# EAGLE board eggShield (EAGLE 6.2)
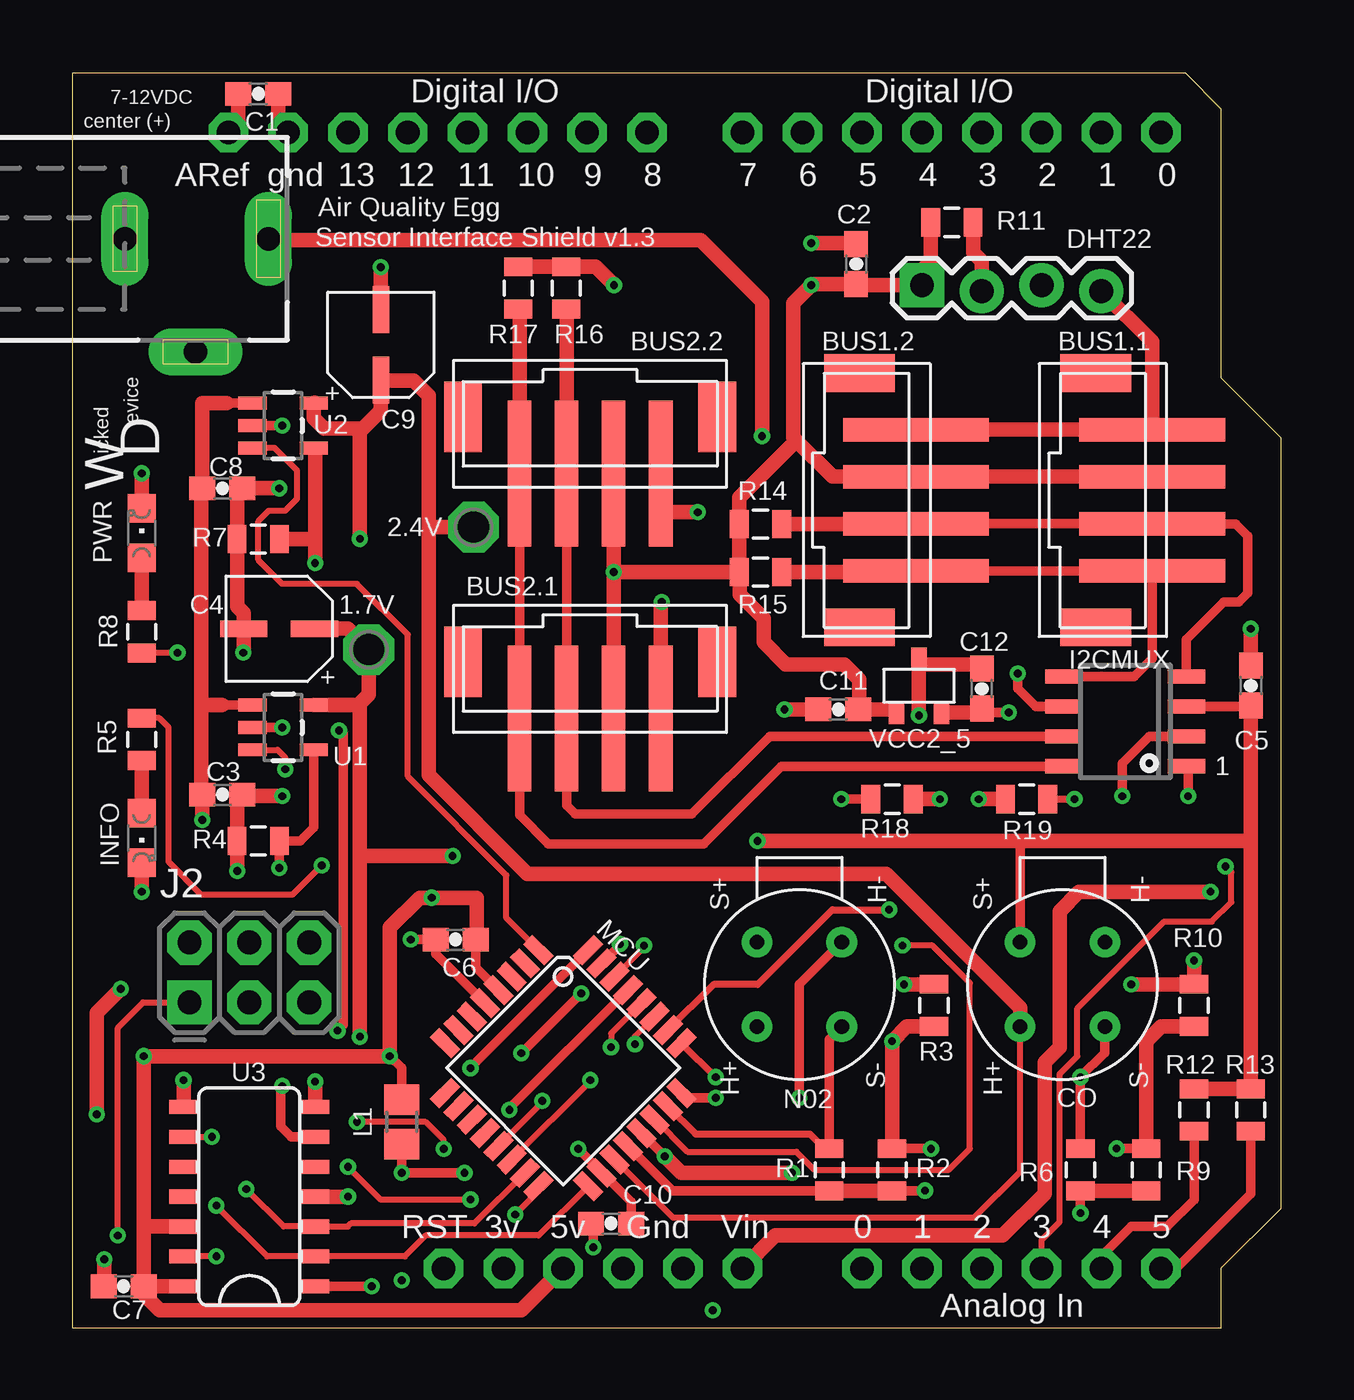
[diagram p0: board, top side]
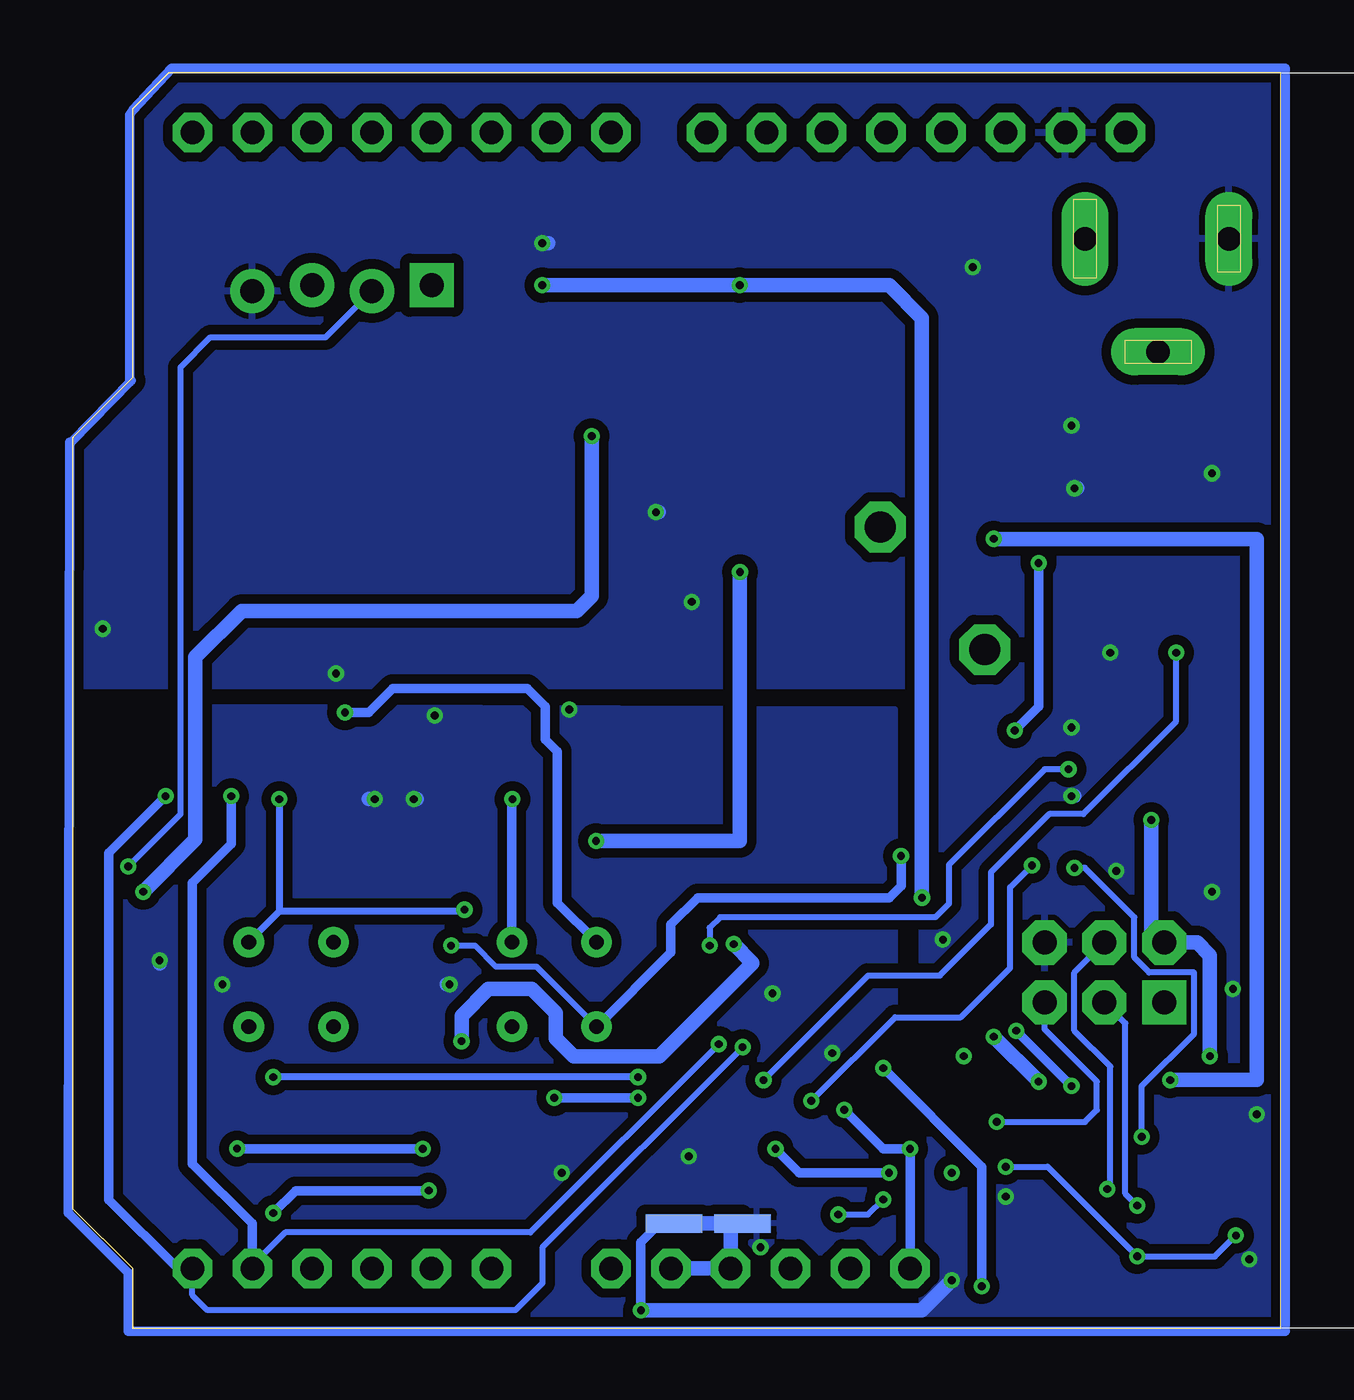
[diagram p1: board, bottom side, seen from below]

Size 51.31 x 53.34 mm. Coordinates in mm from the lower left corner, seen from the top.
Outline: 0,0 0,53.34 47.24,53.34 48.77,51.82 48.77,40.39 51.31,37.85 51.31,5.08 48.77,2.54 48.77,0 0,0
Copper layers (1*16): Top 0.0356mm / dielectric 1.5011mm / Bottom 0.0356mm
Design rules: minimum track width 6mil, minimum drill 13mil, track to track 6mil, track to pad 6mil, pad to pad 6mil, via to via 6mil, smd to smd 6mil, copper to edge 15mil, drill to drill 6mil, minimum pad ring 7mil, minimum via ring 7mil, stop-mask expansion 4mil, vias tented up to drill 0mil, thermal gap 10mil

## Footprints (pad centres in the part's own frame; a part is rotated, then mirrored left to right if it is on the bottom)
DCJ0202 = drill 1 pad 2 long: 1 0,3.1; 2 4.8,0; 3 0,-3
1775470-4 = smd 1 x 6.2: 1 3,0; 2 1,0; 3 -1,0; 4 -3,0 | smd 1.6 x 3: P$5 -5.4,-2.4; P$6 5.4,-2.4
0603-CAP = smd 1.1 x 1: 1 -0.85,0; 2 0.85,0
TYPE-B_ALUMINUM_CAN = smd 0.7 x 2: P$1 0,-1.5; P$2 0,1.5
SR-4 = drill 0.62 pad 1.3: FIGG/E2VS+ 1.8,1.8; FIGSIG/E2VH+ -1.8,1.8; FIGV+/E2V- 1.8,-1.8; FIGV+/E2VSIG -1.8,-1.8
1X04_LOCK = drill 1.016 pad 1.88: DATA 2.54,-0.127; GND 7.62,-0.127; NULL 5.08,0.127 | drill 1.016 pad 1.88 square: VDD 0,0.127
SO8 = smd 0.6 x 1.6: 1 -1.905,-2.6; 2 -0.635,-2.6; 3 0.635,-2.6; 4 1.905,-2.6; 5 1.905,2.6; 6 0.635,2.6; 7 -0.635,2.6; 8 -1.905,2.6
CHIPLED_0805 = smd 1.2 x 1.2: A 0,-1.05; C 0,1.05
2X3-NS = drill 1.016 pad 1.88 square: 1 -2.54,-1.27 | drill 1.016 pad 1.88 octagon: 2 -2.54,1.27; 3 0,-1.27; 4 0,1.27; 5 2.54,-1.27; 6 2.54,1.27
RCL_R0805 = smd 1.3 x 1.5: 1 -0.95,0; 2 0.95,0
TQFP32-08 = smd 1.27 x 0.559: 1 -4.293,2.8; 2 -4.293,2; 3 -4.293,1.2; 4 -4.293,0.4; 5 -4.293,-0.4; 6 -4.293,-1.2; 7 -4.293,-2; 8 -4.293,-2.8; 17 4.293,-2.8; 18 4.293,-2; 19 4.293,-1.2; 20 4.293,-0.4; 21 4.293,0.4; 22 4.293,1.2; 23 4.293,2; 24 4.293,2.8 | smd 0.559 x 1.27: 9 -2.8,-4.293; 10 -2,-4.293; 11 -1.2,-4.293; 12 -0.4,-4.293; 13 0.4,-4.293; 14 1.2,-4.293; 15 2,-4.293; 16 2.8,-4.293; 25 2.8,4.293; 26 2,4.293; 27 1.2,4.293; 28 0.4,4.293; 29 -0.4,4.293; 30 -1.2,4.293; 31 -2,4.293; 32 -2.8,4.293
0805 = smd 0.8 x 1.2: 1 -0.9,0; 2 0.9,0
P1-13 = drill 1.321 pad 2.159 octagon: TP 0,0
SOT23-5 = smd 0.55 x 1.2: 1 -0.95,-1.3; 2 0,-1.3; 3 0.95,-1.3; 4 0.95,1.3; 5 -0.95,1.3
SO014 = smd 0.6 x 1.2: 1 -3.175,-2.8; 2 -1.905,-2.8; 3 -0.635,-2.8; 4 0.635,-2.8; 5 1.905,-2.8; 6 3.175,-2.8; 7 4.445,-2.8; 8 4.445,2.8; 9 3.175,2.8; 10 1.905,2.8; 11 0.635,2.8; 12 -0.635,2.8; 13 -1.905,2.8; 14 -3.175,2.8
ARDUINO-NOHOLE = drill 1 pad 1.676 octagon: 3V 35.56,2.54; 5V 38.1,2.54; A0 50.8,2.54; A1 53.34,2.54; A2 55.88,2.54; A3 58.42,2.54; A4 60.96,2.54; A5 63.5,2.54; AREF 23.876,50.8; D0 63.5,50.8; D1 60.96,50.8; D2 58.42,50.8; D3 55.88,50.8; D4 53.34,50.8; D5 50.8,50.8; D6 48.26,50.8; D7 45.72,50.8; D8 41.656,50.8; D9 39.116,50.8; D10 36.576,50.8; D11 34.036,50.8; D12 31.496,50.8; D13 28.956,50.8; GND 26.416,50.8; GND1 43.18,2.54; GND2 40.64,2.54; RESET 33.02,2.54; VIN 45.72,2.54
PLANE_COUPLER = smd 1.2 x 0.8: 1 -0.6,0; 2 0.6,0
SOT-23-3 = smd 0.65 x 0.95: 1 -0.95,-1.15; 2 0.95,-1.15; 3 0,1.15

## Placement (x,y rotation side)
7-12VDC  DCJ0202  [DCJ0202]  5.21,46.29 270 top
BUS1.1  4-PIN-SMT  [1775470-4]  45.85,35.18 270 top
BUS1.2  4-PIN-SMT  [1775470-4]  35.81,35.18 270 top
BUS2.1  4-PIN-SMT  [1775470-4]  21.97,25.91 180 top
BUS2.2  4-PIN-SMT  [1775470-4]  21.97,36.32 180 top
C1  0.1uF  [0603-CAP]  7.87,52.45 180 top
C2  0.1uF  [0603-CAP]  33.27,45.21 270 top
C3  0.1uF  [0603-CAP]  6.35,22.67 180 top
C4  10uF  [TYPE-B_ALUMINUM_CAN]  8.76,29.72 90 top
C5  0.1uF  [0603-CAP]  50.04,27.3 270 top
C6  0.1uF  [0603-CAP]  16.26,16.51 180 top
C7  0.1uF  [0603-CAP]  2.16,1.78 0 top
C8  0.1uF  [0603-CAP]  6.35,35.69 180 top
C9  10uF  [TYPE-B_ALUMINUM_CAN]  13.08,41.78 0 top
C10  0.1uF  [0603-CAP]  22.86,4.45 180 top
C11  1uF  [0603-CAP]  32.51,26.29 180 top
C12  1uF  [0603-CAP]  38.61,27.18 90 top
CO  E2V  [SR-4]  42.04,14.61 90 top
DHT22  RHT03  [1X04_LOCK]  36.07,44.2 0 top
I2CMUX  PCA9540BD  [SO8]  44.7,25.78 90 top
INFO  GREEN  [CHIPLED_0805]  2.92,20.83 180 top
J2  AVR_SPI_PRG_6NS  [2X3-NS]  7.49,15.11 0 top
L1  FERRITE  [RCL_R0805]  13.97,8.76 90 top
MCU  ATTINY4832A  [TQFP32-08]  20.83,11.05 315 top
N02  E2V  [SR-4]  30.86,14.61 90 top
PWR  RED  [CHIPLED_0805]  2.92,33.78 0 top
R1  2.2kOhm  [0805]  32.13,6.73 90 top
R2  22kOhm  [0805]  34.8,6.73 270 top
R3  220kOhm  [0805]  36.58,13.72 270 top
R4  120kOhm  [0805]  7.87,20.7 0 top
R5  270ohm  [0805]  2.92,25.02 90 top
R6  68kOhm  [0805]  42.8,6.73 90 top
R7  56kOhm  [0805]  7.87,33.53 0 top
R8  270ohm  [0805]  2.92,29.59 270 top
R9  68kOhm  [0805]  45.59,6.73 270 top
R10  680kOhm  [0805]  47.62,13.72 270 top
R11  10kOhm  [0805]  37.34,46.99 0 top
R12  1.8kOhm  [0805]  47.62,9.27 90 top
R13  1.8kOhm  [0805]  50.04,9.27 90 top
R14  1.8kOhm  [0805]  29.21,34.16 180 top
R15  1.8kOhm  [0805]  29.21,32.13 180 top
R16  1.8kOhm  [0805]  20.95,44.2 90 top
R17  1.8kOhm  [0805]  18.92,44.2 90 top
R18  68Ohm  [0805]  34.8,22.48 180 top
R19  68Ohm  [0805]  40.51,22.48 0 top
TP1  TPPAD1-13  [P1-13]  12.57,28.83 0 top
TP2  TPPAD1-13  [P1-13]  17.02,34.04 0 top
U1  V_REG_LDOSMD  [SOT23-5]  8.93,25.53 270 top
U2  V_REG_LDOSMD  [SOT23-5]  8.93,38.35 270 top
U3  MCP42XXX  [SO014]  7.49,4.95 90 top
U$7  ARDUINO-NOHOLE  [ARDUINO-NOHOLE]  -17.27,0 0 top
U$13  PLANE_COUPLER  [PLANE_COUPLER]  22.86,4.45 180 bottom
U$14  PLANE_COUPLER  [PLANE_COUPLER]  25.78,4.45 0 bottom
VCC2_5  AP7333SA  [SOT-23-3]  35.94,27.3 0 top

## Library data of the parts
7-12VDC = con-jack
BUS1.1 BUS1.2 BUS2.1 BUS2.2 C4 C9 I2CMUX U$13 U$14 VCC2_5 = wicked-device
C1-C3 C5-C8 C10-C12 J2 R1-R19 U1 U2 = SparkFun
CO DHT22 N02 = ricardo
INFO PWR U$7 = adafruit
L1 = nanodeRF_11
MCU = axeio-SparkFun
TP1 TP2 = testpad
U3 = SparkFun-AnalogIC

## Nets
3V: U$7.3V
5V: BUS1.1.3 BUS1.2.3 BUS2.1.3 BUS2.2.3 C2.2 C3.2 C5.2 C6.1 C7.2 C8.2 C11.1 CO.FIGG/E2VS+ DHT22.VDD I2CMUX.3 J2.2 L1.2 MCU.4 R11.1 R12.2 R13.2 R14.2 R15.2 R16.2 R17.2 U1.1 U2.1 U3.12 U3.14 U$7.5V VCC2_5.1
/POT_CS: MCU.32 U3.1
/R1_SEL: MCU.20 R1.1 R2.2 R6.1 R9.2
/R2_SEL: MCU.31 R2.1 R3.2 R9.1 R10.2
/RESET: J2.5 MCU.29 U$7.RESET
AGND: C10.2 C11.2 C12.2 MCU.21 R3.1 R10.1 R18.1 R19.1 U$13.1 VCC2_5.3
AVCC: C10.1 L1.1 MCU.18
CO_FEEDBACK: CO.FIGV+/E2V- MCU.26 R19.2
CO_HEATER_EN: MCU.1 U2.3
CO_HEATER_V: C9.P$1 CO.FIGSIG/E2VH+ MCU.19 TP2.TP U2.5 U3.8
CO_RH-: R7.2 U2.4 U3.6
CO_SENSE: CO.FIGV+/E2VSIG MCU.25 R6.2
DHT22_IO: DHT22.DATA R11.2 U$7.A3
GND: 7-12VDC.3 BUS1.1.4 BUS1.2.4 BUS2.1.4 BUS2.2.4 C1.1 C2.1 C3.1 C4.P$2 C5.1 C6.2 C7.1 C8.1 C9.P$2 DHT22.GND I2CMUX.6 INFO.C J2.6 MCU.5 PWR.C R4.1 R7.1 U1.2 U2.2 U3.4 U$7.GND U$14.1
MISO: U$7.D12
MISO_B: J2.1 MCU.16 U3.13
MOSI: U$7.D11
MOSI_B: J2.4 MCU.15 U3.3
N$1: INFO.A R5.1
N$3: PWR.A R8.1
N$4: C1.2 U$7.AREF
NO2_FEEDBACK: MCU.24 N02.FIGV+/E2V- R18.2
NO2_HEATER_EN: MCU.30 U1.3
NO2_HEATER_V: C4.P$1 MCU.22 N02.FIGSIG/E2VH+ TP1.TP U1.5 U3.7
NO2_OPERATING_V: C12.1 N02.FIGG/E2VS+ VCC2_5.2
NO2_RH-: R4.2 U1.4 U3.9
NO2_SENSE: MCU.23 N02.FIGV+/E2VSIG R1.2
POWER: MCU.14 R8.2
RETURN_GND: U$7.GND1 U$7.GND2 U$13.2 U$14.2
SCK: U$7.D13
SCK_B: J2.3 MCU.17 U3.2
SCL: I2CMUX.1 MCU.28 R13.1 U$7.A5
SCL0: BUS1.1.1 BUS1.2.1 I2CMUX.5 R15.1
SCL1: BUS2.1.1 BUS2.2.1 I2CMUX.8 R17.1
SDA: I2CMUX.2 MCU.27 R12.1 U$7.A4
SDA0: BUS1.1.2 BUS1.2.2 I2CMUX.4 R14.1
SDA1: BUS2.1.2 BUS2.2.2 I2CMUX.7 R16.1
STATUS: MCU.13 R5.2
VIN: 7-12VDC.1 U$7.VIN

## Tracks (layer width: path | path; a pad name or v marks a point on that pad's centre or on a via)
5V  (via drill 0.33)
  Top 0.406: 6.54,39.31 6.54,39.3 U2.1 | 5.53,26.48 5.46,26.54 | 5.53,24.58 5.46,24.51 | 6.35,26.48 U1.1 | 18.02,14.37 MCU.4 17.11,15.34 C6.1 | CO.FIGG/E2VS+ 40.24,20.68 40.26,20.7 | I2CMUX.3 50,26.42 C5.2 | v13.46,11.56 13.97,11.05 L1.2
  Top 0.61: 6.54,39.31 5.5,39.31 C8.2 5.46,35.69 5.46,26.54 5.46,24.51 5.46,22.67 C3.2 v5.5,21.59 5.46,21.59 | 5.53,26.48 6.35,26.48 | R11.1 36.45,46.98 36.45,45.34 36.07,44.96 DHT22.VDD 33.31,44.32 C2.2 31.41,44.36 v31.37,44.32 30.61,43.56 30.61,37.85 30.73,37.72 | BUS1.1.3 BUS1.2.3 32.27,36.18 30.73,37.72 | BUS2.2.3 v22.97,32.13 | v22.97,32.13 BUS2.1.3 | U3.14 C7.2 | 49.92,10.17 50.04,10.29 50.04,20.7 | 50.04,20.7 C5.2 | 22.97,44.31 v22.99,44.32 22.21,45.1 R16.2 R17.2 | R15.2 R14.2 | R14.2 28.31,35.3 30.73,37.72 | 50.04,20.7 40.26,20.7 v29.08,20.7 | 3.01,4.32 v3.01,11.56 v13.46,11.56 13.46,17.02 14.73,18.29 v15.24,18.29 17.14,18.29 17.14,16.51 C6.1 | U3.12 3.01,4.32 | C7.2 3.01,4.32 | U$7.5V 19.05,0.76 3.68,0.76 3.01,1.44 C7.2 | R14.2 28.31,32.14 28.32,32.13 | 28.32,32.13 v22.97,32.13 | R13.2 49.92,10.17 | 49.92,10.17 R12.2 | VCC2_5.1 34.86,26.29 C11.1 33.4,26.33 33.4,27.56 32.77,28.19 30.29,28.19 29.34,29.15 29.34,30.16 28.32,31.18 28.32,32.13
  Bottom 0.61: v31.37,44.32 v22.99,44.32 16.64,44.32 15.24,42.93 v15.24,18.29 | v5.5,21.59 5.5,16.93 J2.2 3.56,16.38 3.01,15.84 v3.01,11.56 3.05,11.6 | v29.08,20.7 22.97,20.7 v22.97,32.13
/POT_CS  (via drill 0.33)
  Top 0.406: MCU.32 16.89,11.07 v16.89,11.05 | v12.7,1.78 U3.1
  Bottom 0.406: v16.89,11.05 12.7,6.86 v12.7,1.78
/R1_SEL  (via drill 0.33)
  Top 0.406: 32.12,5.84 R1.1 25.48,5.83 MCU.20 | R2.2 34.81,5.84 v36.2,5.84 | R6.1 v42.8,4.89
  Top 0.61: R6.1 R9.2 | R1.1 R2.2
  Bottom 0.406: v36.2,5.84 41.85,5.84 v42.8,4.89
/R2_SEL  (via drill 0.33)
  Top 0.406: R9.1 v44.33,7.63 v44.32,7.62 | R2.1 36.44,7.63 v36.45,7.62 | v23.24,16.32 23.18,16.23 MCU.31
  Top 0.61: R9.1 45.59,12.19 46.23,12.83 R10.2 | R2.1 v34.8,12.19 35.42,12.82 R3.2
  Bottom 0.406: v44.33,7.63 v44.32,7.62 v36.45,7.62
  Bottom 0.61: v34.8,12.19 34.8,13.27 33.66,14.41 31.81,14.41 30.8,13.4 30.8,12.32 30.04,11.56 26.39,11.56 MCU.31 22.45,15.53 v23.24,16.32
/RESET  (via drill 0.33)
  Top 0.254: v15.75,7.62 15.75,8 14.99,8.76 v12.06,8.76
  Top 0.406: MCU.29 18.54,9.33 v18.54,9.27
  Bottom 0.254: J2.5 10.03,12.7 7.81,10.48 7.81,9.27 8.32,8.76 v12.06,8.76
  Bottom 0.406: v18.54,9.27 16.89,7.62 v15.75,7.62 U$7.RESET
AGND  (via drill 0.33)
  Top 0.406: C10.2 22.1,4.36 v22.1,3.43 | v47.62,15.62 47.62,14.61 | v19.05,11.68 v21.59,14.22 | MCU.21 v25.14,7.3 v25.15,7.3
  Top 0.61: R10.1 v47.62,15.62 | R19.1 v38.48,22.48 | R18.1 v36.83,22.48 | R3.1 v35.31,14.62 v35.31,14.61 | 47.62,14.61 v44.96,14.61 | C11.2 v30.23,26.29 | VCC2_5.3 35.94,28.19 | 35.94,28.19 v35.94,26.04 | C12.2 38.61,28.19 35.94,28.19 | v25.14,7.3 25.84,6.6 v30.54,6.6
  Bottom 0.61: v47.62,15.62 47.62,15.49 | v38.48,22.48 38.73,22.48 | v36.83,22.48 36.7,22.48 | v35.31,14.61 35.43,14.61
  pour Bottom (isolate 0.406): 16.38,26.29 51.44,26.42 51.44,2.54 48.77,2.54 48.77,0 16.38,0
AVCC  (via drill 0.33)
  Top 0.406: L1.1 v13.97,6.6 v16.64,6.6 | v21.46,7.62 22.45,6.63 MCU.18 22.48,6.6 23.71,5.37 C10.1
  Bottom 0.406: v21.46,7.62 20.45,6.6 v16.64,6.6
CO_FEEDBACK  (via drill 0.33)
  Top 0.305: R19.2 v42.55,22.48 | MCU.26 27.21,14.61 29.08,14.61 32.26,17.78 v34.67,17.78
  Bottom 0.305: v42.55,22.48 42.55,17.7 | 42.55,17.7 CO.FIGV+/E2V- 43.94,16.3 | v34.67,17.78 34.75,17.7 42.55,17.7
CO_HEATER_EN
  Top 0.254: MCU.1 18.41,17.42 18.41,19.24 14.22,23.43 14.22,29.46 12.06,31.62 8.89,31.62 7.87,32.64 7.87,34.29 8.32,34.73 9.02,34.73 9.53,35.24 9.53,36.45 8.57,37.4 U2.3
CO_HEATER_V  (via drill 0.33)
  Top 0.254: MCU.19 25.48,4.7 38.29,4.7 40.24,6.65 CO.FIGSIG/E2VH+
  Top 0.61: CO.FIGSIG/E2VH+ 40.24,13.61 34.54,19.3 19.3,19.3 15.11,23.5 15.11,34.04 | 12.19,38.1 12.19,38.23 10.67,38.23 10.23,38.66 U2.5 10.26,39.34 | 12.19,38.1 v12.19,33.54 | U3.8 v4.7,10.54 | 15.11,34.04 15.11,39.62 14.48,40.26 13.11,40.26 C9.P$1 13.08,38.99 12.19,38.1 | TP2.TP 15.11,34.04
  Bottom 0.61: v12.19,33.54 1.15,33.54 1.02,33.4 | v4.7,10.54 1.02,10.54 1.02,33.4 | 1.02,33.4 1.02,33.53
CO_RH-  (via drill 0.33)
  Top 0.406: U2.4 10.29,37.35 10.29,37.21 | U3.6 9.27,8.13 8.83,8.57 8.83,10.22 v8.89,10.29 | v11.24,12.64 11.49,12.89 11.49,25.21 arc90 v11.3,25.4
  Top 0.61: 10.29,37.21 10.29,33.53 | 10.29,33.53 v10.29,32.51 | 10.29,33.53 R7.2
  Bottom 0.406: v11.3,25.4 10.29,26.42 v10.29,32.51 | v8.89,10.29 v11.24,12.64
CO_SENSE  (via drill 0.33)
  Top 0.305: MCU.25 27.28,10.67 v27.3,10.67
  Top 0.406: R6.2 v42.8,10.67 43.84,11.71 CO.FIGV+/E2VSIG
  Bottom 0.305: v27.3,10.67 v42.8,10.67
DHT22_IO  (via drill 0.33)
  Top 0.254: U$7.A3 41.15,3.75 41.91,4.51 41.91,10.79 42.67,11.56 42.67,13.59 46.35,17.27 48.39,17.27 49.21,18.1 49.21,19.37 v48.96,19.62
  Top 0.61: R11.2 38.24,45.71 38.61,45.34 DHT22.DATA
  Bottom 0.254: v48.96,19.62 46.74,21.84 46.74,40.83 45.47,42.1 40.58,42.1 DHT22.DATA
GND  (via drill 0.33)
  Top 0.406: U1.2 v8.89,25.53 | U2.2 v8.89,38.35 | MCU.5 15.41,15.9 C6.2 | 15.37,16.51 v14.35,16.51 | I2CMUX.6 40.89,26.42 40.13,27.18 v40.13,27.81
  Top 0.61: C5.1 v50.04,29.72 | v6.99,19.43 6.99,20.69 R4.1 6.97,22.67 C3.1 7.26,22.61 v8.89,22.61 | v8.76,35.69 C8.1 6.97,35.46 R7.1 6.99,33.52 6.99,30.67 7.26,30.39 C4.P$2 7.26,28.73 v7.24,28.7 | C2.1 33.23,46.1 v31.37,46.1 | BUS1.2.4 BUS1.1.4 45.85,41.91 DHT22.GND | 24.97,24.26 BUS2.1.4 24.97,30.81 v25.02,30.86 | BUS2.2.4 24.97,34.67 v26.54,34.67 | C7.1 1.33,1.78 v1.33,2.92 | U3.4 v11.68,5.59 | C6.2 15.37,16.51 | INFO.C v2.92,18.54 | PWR.C v2.92,36.32 | v1.02,9.08 1.02,13.4 v2.03,14.41 | C9.P$2 v13.08,45.09 | U$7.GND 8.72,51.22 C1.1
  Bottom 0.406: U$14.1 27.18,3.65 v27.18,0.76
  Bottom 0.61: v8.89,22.61 8.76,22.61 | v8.76,35.69 8.64,35.69 | v31.37,46.1 31.11,46.1 | v26.54,34.67 26.42,34.67 | v13.97,2.03 15.24,0.76 v27.18,0.76
  pour Bottom (isolate 0.406): -1.27,53.34 15.24,53.34 15.24,-1.27 -1.27,-1.27
  pour Bottom (isolate 0.406): 52.07,27.3 15.24,27.3 15.24,53.34 52.07,53.34
MISO_B  (via drill 0.33)
  Top 0.254: MCU.16 19.77,5.8 v18.8,4.83 | v16.89,5.46 13.08,5.46 v11.68,6.86 | v1.91,3.94 1.91,12.76 2.98,13.84 J2.1 | v6.1,3.05 U3.13
  Bottom 0.254: v18.8,4.83 17.53,4.83 v16.89,5.46 | v11.68,6.86 9.91,6.86 v6.1,3.05 2.79,3.05 v1.91,3.94
MOSI_B  (via drill 0.33)
  Top 0.254: MCU.15 17.05,4.45 11.81,4.45 11.68,4.32 U3.3 8.95,4.32 v7.37,5.91
  Bottom 0.254: v7.37,5.91 7.24,6.03 7.24,11.11 8.76,12.64 8.76,15.11 J2.4
N$1
  Top 0.61: INFO.A R5.1
N$2
  Bottom 0.406: -0.19,-0.13 -0.19,53.53 47.12,53.53 48.77,51.75 48.9,51.56 48.9,40.2 48.83,40.26 51.37,37.66 51.44,37.66 51.5,4.89 48.96,2.35 48.96,-0.13 -0.19,-0.13
N$3
  Top 0.61: PWR.A R8.1
N$4
  Top 0.61: U$7.AREF 7.02,51.22 C1.2
NO2_FEEDBACK  (via drill 0.33)
  Top 0.406: R18.2 v32.64,22.48 | v30.86,9.78 30.86,14.61 N02.FIGV+/E2V- | MCU.24 26.06,9.78 v27.3,9.78
  Bottom 0.406: v32.64,22.48 32.66,22.48 N02.FIGV+/E2V- | v30.86,9.78 v27.3,9.78
NO2_HEATER_EN  (via drill 0.33)
  Top 0.254: U1.3 8.7,24.58 9.02,24.26 v9.02,23.75 | MCU.30 24.26,16.18 v24.26,16.26
  Bottom 0.254: v9.02,23.75 10.03,23.75 14.1,19.68 14.1,18.03 14.67,17.46 23.81,17.46 24.26,17.02 v24.26,16.26
NO2_HEATER_V  (via drill 0.33)
  Top 0.254: MCU.22 24.73,8.86 26.1,7.49 30.73,7.49 31.5,6.73 37.21,6.73 38.1,7.62 38.1,14.67 36.51,16.26 v35.24,16.26
  Top 0.61: v12.19,12.38 12.19,20.07 | U1.5 12.13,26.48 | 12.13,26.48 12.19,26.42 12.19,20.07 | C4.P$1 11.68,29.72 TP1.TP 12.57,26.92 12.13,26.48 | v10.29,10.48 U3.7 | v16.13,20.07 12.19,20.07
  Bottom 0.254: v35.24,16.26 34.23,16.26 33.34,15.37 31.62,15.37 N02.FIGSIG/E2VH+
  Bottom 0.406: N02.FIGSIG/E2VH+ 25.91,15.96 25.91,17.14 24.77,18.29 16.64,18.29 16.13,18.8 v16.13,20.07
  Bottom 0.61: v12.19,12.38 v10.29,10.48
NO2_OPERATING_V  (via drill 0.33)
  Top 0.406: VCC2_5.2 36.96,26.16 | v39.75,26.16 38.77,26.16 C12.1
  Top 0.61: VCC2_5.2 38.44,26.16 C12.1
  Bottom 0.406: N02.FIGG/E2VS+ 30.73,18.08 30.73,24.51 31.24,25.02 31.24,26.42 32,27.18 37.72,27.18 38.73,26.16 v39.75,26.16
NO2_RH-  (via drill 0.33)
  Top 0.254: U3.9 v5.91,8.13
  Top 0.406: 8.74,20.7 R4.2 | v8.76,19.56 R4.2 | R4.2 9.65,20.7 10.23,21.28 U1.4
  Top 0.61: 8.76,20.71 R4.2
  Bottom 0.254: v5.91,8.13 5.91,10.29 3.68,12.51 3.68,15.11 5.59,15.11 6.22,15.75 6.22,17.46 8.32,19.56 v8.76,19.56
NO2_SENSE
  Top 0.305: MCU.23 26.45,8.26 31.3,8.26 31.94,7.62 R1.2
  Top 0.406: N02.FIGV+/E2VSIG 32.13,12.28 R1.2
POWER  (via drill 0.33)
  Top 0.254: v4.45,28.7 4.43,28.69 R8.2 | MCU.14 21.97,10.49 v21.97,10.54
  Bottom 0.254: v4.45,28.7 4.45,25.78 8.38,21.84 9.84,21.84 12.32,19.37 12.32,17.14 14.48,14.99 17.53,14.99 v21.97,10.54
RETURN_GND
  Bottom 0.61: U$7.GND1 U$7.GND2 23.37,4.35 U$13.2 U$14.2
SCK_B  (via drill 0.33)
  Top 0.254: MCU.17 19.79,3.94 14.99,3.94 14.1,3.05 U3.2 8.26,3.05 v6.1,5.21
  Bottom 0.254: v6.1,5.21 6.6,5.71 6.6,12.95 J2.3
SCL  (via drill 0.33)
  Top 0.254: MCU.28 22.86,12.52 v22.86,11.94
  Top 0.406: U$7.A5 46.86,2.54 50.04,5.71 R13.1 | I2CMUX.1 47.37,23.81 v47.37,22.61
  Bottom 0.254: v22.86,11.94 31.37,3.43 31.37,1.91 32.51,0.76 45.59,0.76 46.23,1.4 U$7.A5
  Bottom 0.406: v47.37,22.61 49.78,20.19 49.78,5.46 46.86,2.54 U$7.A5
SCL0
  Top 0.406: I2CMUX.5 45.09,27.69 45.85,28.45 BUS1.1.1 BUS1.2.1 35.81,32.13
  Top 0.61: R15.1 35.77,32.13 BUS1.2.1
SCL1
  Top 0.406: BUS2.2.1 BUS2.1.1 18.97,21.8 20.19,20.57 26.8,20.57 30.1,23.88 I2CMUX.8
  Top 0.61: R17.1 18.97,43.3 BUS2.2.1
SDA  (via drill 0.33)
  Top 0.254: MCU.27 23.88,12.4 v23.88,12.06
  Top 0.406: U$7.A4 43.69,3.05 44.96,4.32 46.48,4.32 47.62,5.46 R12.1 | I2CMUX.2 45.72,25.15 44.58,24 v44.58,22.61
  Bottom 0.254: v23.88,12.06 31.88,4.06 42.29,4.06 43.69,2.67 U$7.A4
  Bottom 0.406: v44.58,22.61 44.58,20.57 46.23,18.92 46.23,6.99 43.69,4.45 U$7.A4
SDA0
  Top 0.406: I2CMUX.4 47.3,29.27 48.9,30.86 49.53,30.86 49.91,31.24 49.91,33.66 49.4,34.16 45.86,34.16 BUS1.1.2 BUS1.2.2 35.81,34.16
  Top 0.61: R14.1 35.8,34.16 BUS1.2.2
SDA1
  Top 0.406: BUS2.2.2 BUS2.1.2 20.97,22.21 21.34,21.84 26.29,21.84 29.59,25.15 I2CMUX.7
  Top 0.61: R16.1 20.97,43.3 BUS2.2.2
STATUS  (via drill 0.33)
  Top 0.254: 18.14,7.73 MCU.13 19.94,9.59 v19.94,9.65 | R5.2 3.67,25.92 4.06,25.53 4.06,19.81 5.46,18.41 9.32,18.41 v10.57,19.66
  Bottom 0.254: v19.94,9.65 16.38,13.21 13.59,13.21 11.49,15.3 11.49,18.73 v10.57,19.66
VIN  (via drill 0.33)
  Top 0.61: U$7.VIN 29.84,3.94 39.5,3.94 41.27,5.71 41.27,11.3 41.91,11.94 41.91,17.72 42.74,18.54 v48.32,18.54 | 7-12VDC.1 8.37,46.23 26.67,46.23 29.27,43.62 v29.27,37.91
  Bottom 0.61: v29.27,37.91 29.27,31.11 29.91,30.48 44.13,30.48 46.1,28.51 46.1,20.77 v48.32,18.54

## Text on the board
tPlace: center (+) | Air Quality Egg | Sensor Interface Shield v1.3 | evice | C9 | icked | D | W | 2.4V | C4 | 1.7V | 1